# Altium PCB SiPM Readout.PcbDoc
Units mil, origin at the board's own origin, x right, y up, seen from the top; angles counter-clockwise.
Board outline 6690 x 6655 mil, 2 copper layers (Top Layer, Bottom Layer); 101 components, 68 nets, 1500 pads, 43 vias.
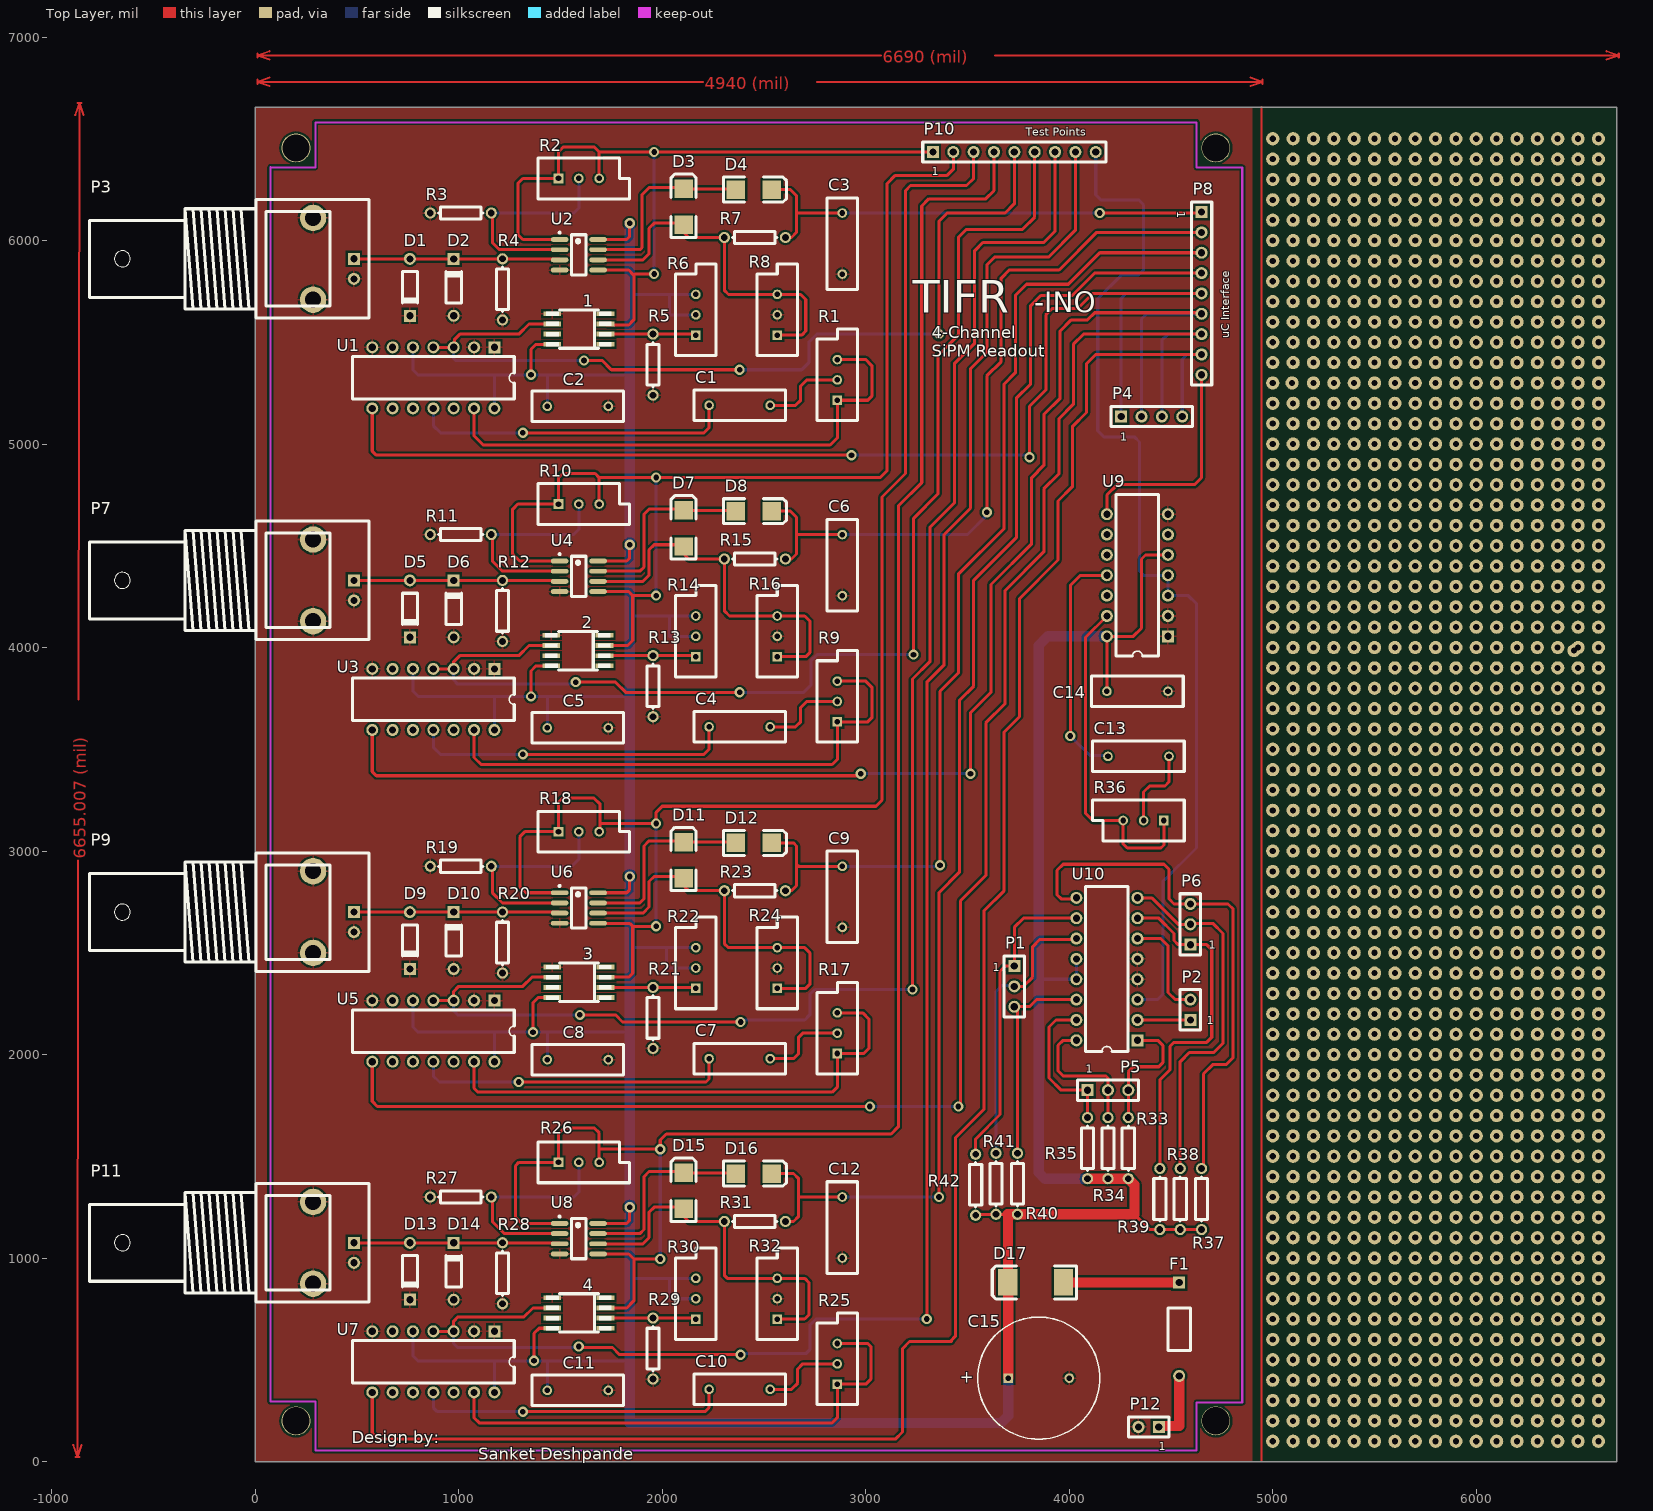
[diagram p0: Top Layer view]
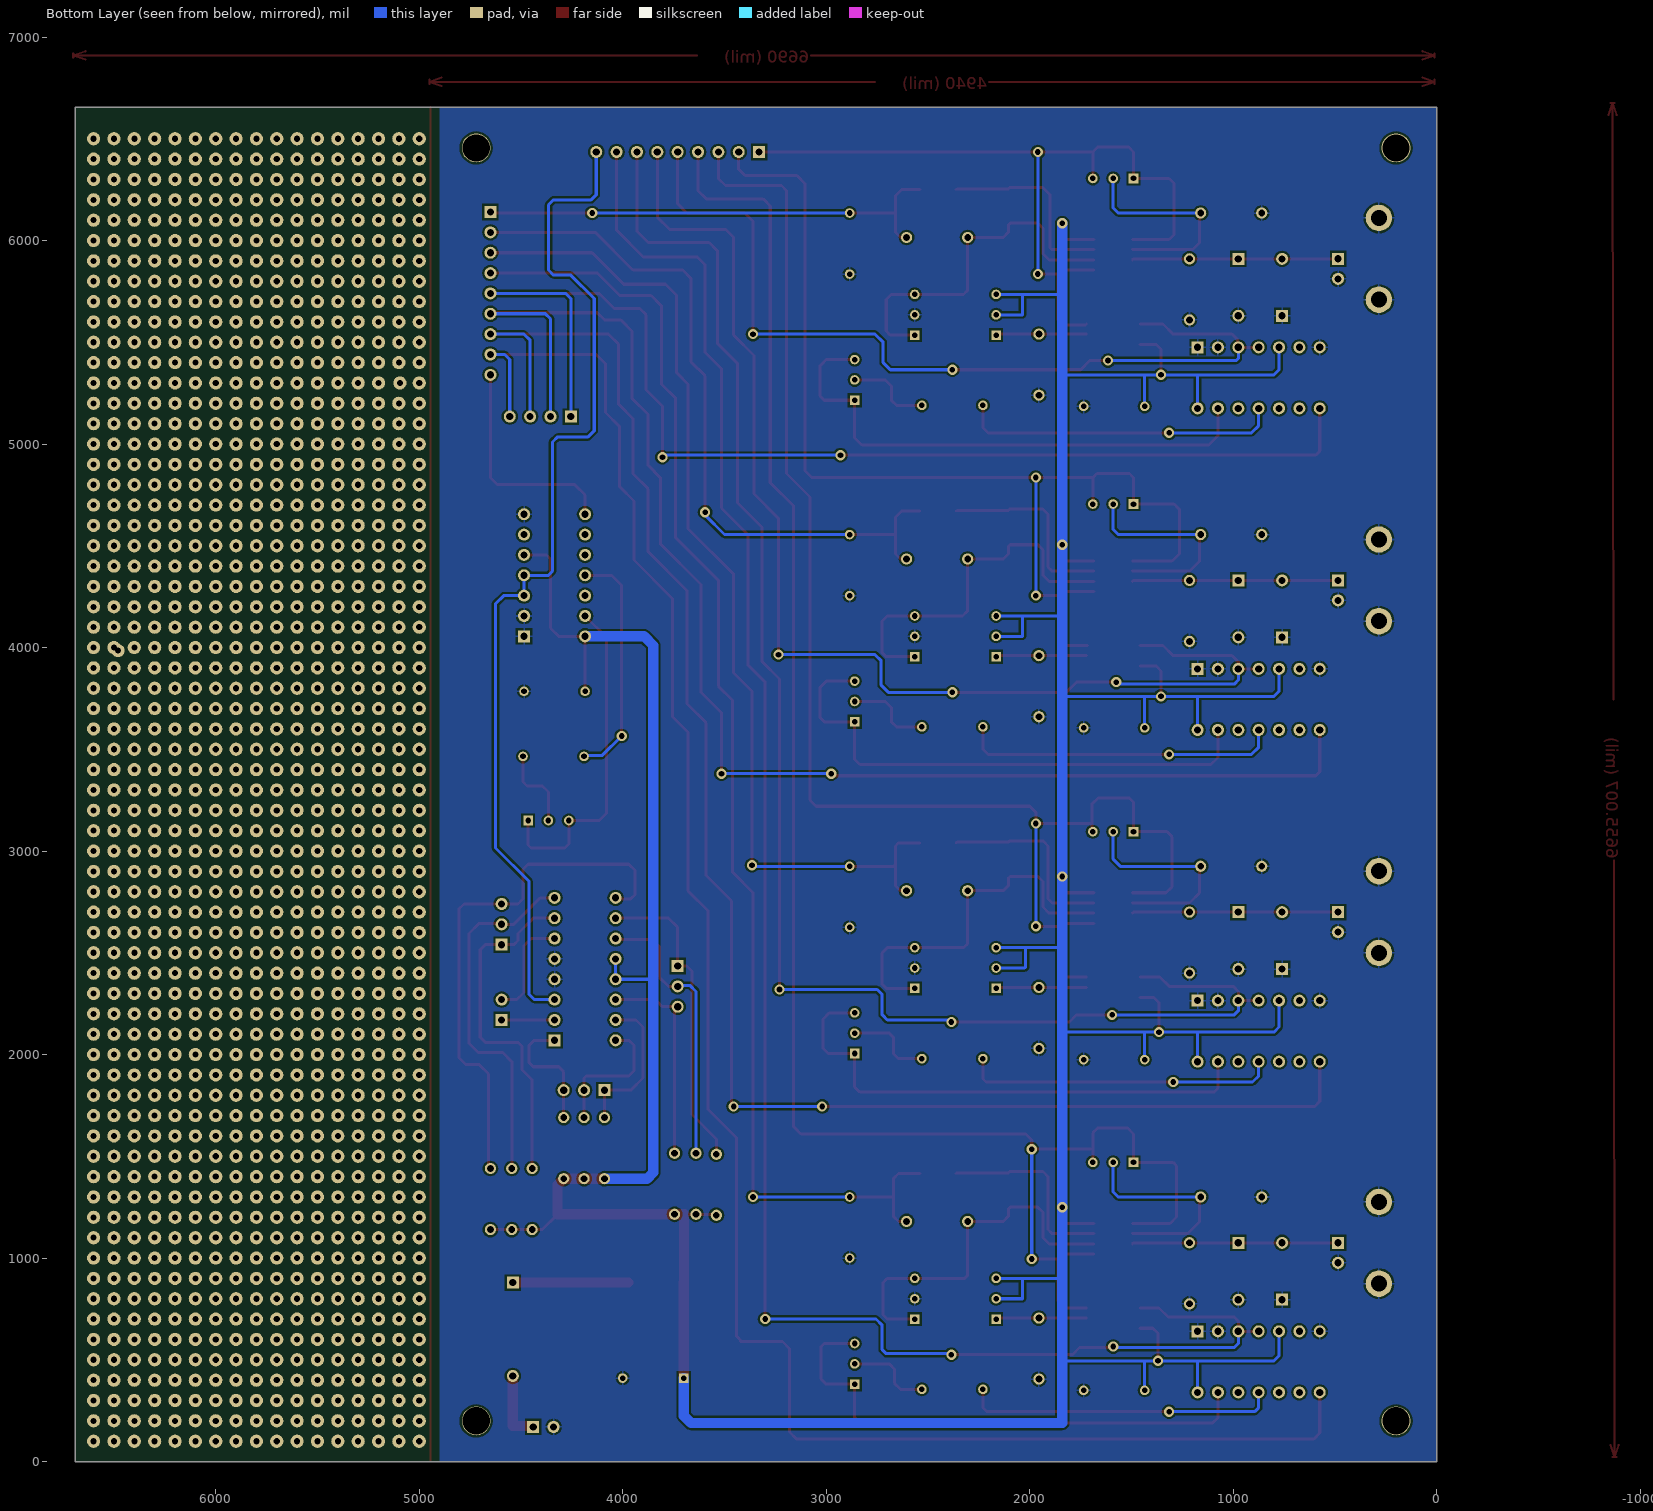
[diagram p1: Bottom Layer view, seen from below]

## Layer stack, top to bottom
Top Solder: solder mask 0.4, Solder Resist, Dk 3.5
Top Layer: signal copper 1.4
Dielectric 1: dielectric 12.6, FR-4, Dk 4.8
Bottom Layer: signal copper 1.4
Bottom Solder: solder mask 0.4, Solder Resist, Dk 3.5

## Board outline
0,0 6690,0 6690,6655 0,6655

## Design rules (kind name [scope] priority, off if disabled: settings)
Clearance [All] p1: gap=10
PolygonConnect [All] p1: connectstyle=Relief reliefconductorwidth=10 reliefentries=4 polygonreliefangle="90 Angle" airgapwidth=10
RoutingVias [All] p1: holewidth=28 width=50 viastyle="Through Hole" minholewidth=28 minwidth=50 maxholewidth=28 maxwidth=50
SolderMaskExpansion [All] p1: expansion=4
Width [All] p1: maxlimit=55 minlimit=15 preferedwidth=15 minimp=50.000000 maximp=50.000000 favimp=50.000000
30 further rules are at their usual default settings.

## Classes and differential pairs
component class "Channel 1": 1 C1 C2 C3 D1 D2 D3 D4 R1 R2 R3 R4 R5 R6 R7 R8 U1 U2
component class "Channel 2": 2 C4 C5 C6 D5 D6 D7 D8 R9 R10 R11 R12 R13 R14 R15 R16 U3 U4
component class "Channel 3": 3 C7 C8 C9 D9 D10 D11 D12 R17 R18 R19 R20 R21 R22 R23 R24 U5 U6
component class "Channel 4": 4 C10 C11 C12 D13 D14 D15 D16 R25 R26 R27 R28 R29 R30 R31 R32 U7 U8

## Components (designator, comment, footprint, x,y, rotation, side; value= is the part's Value field where it differs from the comment)
1 "TL714" SO-08M 1590,5565 r90 top
2 "TL714" SO-08M 1585,3985 r90 top
3 "TL714" SO-08M 1590,2355 r90 top
4 "TL714" SO-08M 1590,730 r90 top
C1 "Cap" RAD-0.3 2380,5190 r0 top
C2 "Cap" RAD-0.3 1585,5185 r180 top
C3 "Cap" RAD-0.3 2885,5985 r90 top
C4 "Cap" RAD-0.3 2380,3610 r0 top
C5 "Cap" RAD-0.3 1585,3605 r180 top
C6 "Cap" RAD-0.3 2885,4405 r90 top
C7 "Cap" RAD-0.3 2380,1980 r0 top
C8 "Cap" RAD-0.3 1585,1975 r180 top
C9 "Cap" RAD-0.3 2885,2775 r90 top
C10 "Cap" RAD-0.3 2380,355 r0 top
C11 "Cap" RAD-0.3 1585,350 r180 top
C12 "Cap" RAD-0.3 2885,1150 r90 top
C13 "Cap" RAD-0.3 4340,3465 r0 top
C14 "Cap" RAD-0.3 4335,3785 r180 top
C15 "Cap Pol1" RB7.6-15 3850,410 r180 top
D1 "Diode 1N914" DO-35 760,5770 r270 top
D2 "Diode 1N914" DO-35 975,5770 r90 top
D3 "D Schottky" SMB 2105,6165 r90 top
D4 "D Schottky" SMB 2450,6250 r0 top
D5 "Diode 1N914" DO-35 760,4190 r270 top
D6 "Diode 1N914" DO-35 975,4190 r90 top
D7 "D Schottky" SMB 2105,4585 r90 top
D8 "D Schottky" SMB 2450,4670 r0 top
D9 "Diode 1N914" DO-35 760,2560 r270 top
D10 "Diode 1N914" DO-35 975,2560 r90 top
D11 "D Schottky" SMB 2105,2955 r90 top
D12 "D Schottky" SMB 2450,3040 r0 top
D13 "Diode 1N914" DO-35 760,935 r270 top
D14 "Diode 1N914" DO-35 975,935 r90 top
D15 "D Schottky" SMB 2105,1330 r90 top
D16 "D Schottky" SMB 2450,1415 r0 top
D17 "Diode" SMC 3835,880 r180 top
F1 "Fuse 2" PIN-W2/E2.8 4540,650 r270 top
P1 "Header 3" HDR1X3 3730,2435 r270 top
P2 "Header 2" HDR1X2 4595,2170 r90 top
P3 "BNC" "BNC_RA CON" 485,5910 r0 top
P4 "Header 4" HDR1X4 4255,5135 r0 top
P5 "Header 3" HDR1X3 4090,1825 r0 top
P6 "Header 3" HDR1X3 4595,2540 r90 top
P7 "BNC" "BNC_RA CON" 485,4330 r0 top
P8 "Micro-Controller Interface" HDR1X9 4650,6140 r270 top
P9 "BNC" "BNC_RA CON" 485,2700 r0 top
P10 "Test Points" HDR1X9 3330,6435 r0 top
P11 "BNC" "BNC_RA CON" 485,1075 r0 top
P12 "Power" HDR1X2 4440,170 r180 top
R1 "RPot" VR5 2860,5315 r90 top
R2 "RPot" VR5 1590,6305 r0 top
R3 "Res1" AXIAL-0.3 1010,6135 r0 top
R4 "Res1" AXIAL-0.3 1215,5760 r90 top
R5 "Res1" AXIAL-0.3 1955,5390 r270 top
R6 "RPot" VR5 2165,5635 r90 top
R7 "Res1" AXIAL-0.3 2455,6015 r0 top
R8 "RPot" VR5 2565,5635 r90 top
R9 "RPot" VR5 2860,3735 r90 top
R10 "RPot" VR5 1590,4705 r0 top
R11 "Res1" AXIAL-0.3 1010,4555 r0 top
R12 "Res1" AXIAL-0.3 1215,4180 r90 top
R13 "Res1" AXIAL-0.3 1955,3810 r270 top
R14 "RPot" VR5 2165,4055 r90 top
R15 "Res1" AXIAL-0.3 2455,4435 r0 top
R16 "RPot" VR5 2565,4055 r90 top
R17 "RPot" VR5 2860,2105 r90 top
R18 "RPot" VR5 1590,3095 r0 top
R19 "Res1" AXIAL-0.3 1010,2925 r0 top
R20 "Res1" AXIAL-0.3 1215,2550 r90 top
R21 "Res1" AXIAL-0.3 1955,2180 r270 top
R22 "RPot" VR5 2165,2425 r90 top
R23 "Res1" AXIAL-0.3 2455,2805 r0 top
R24 "RPot" VR5 2565,2425 r90 top
R25 "RPot" VR5 2860,480 r90 top
R26 "RPot" VR5 1590,1470 r0 top
R27 "Res1" AXIAL-0.3 1010,1300 r0 top
R28 "Res1" AXIAL-0.3 1215,925 r90 top
R29 "Res1" AXIAL-0.3 1955,555 r270 top
R30 "RPot" VR5 2165,800 r90 top
R31 "Res1" AXIAL-0.3 2455,1180 r0 top
R32 "RPot" VR5 2565,800 r90 top
R33 "Res1" AXIAL-0.3 4290,1540 r90 top
R34 "Res1" AXIAL-0.3 4190,1540 r90 top
R35 "Res1" AXIAL-0.3 4090,1540 r90 top
R36 "RPot" VR5 4365,3150 r180 top
R37 "Res1" AXIAL-0.3 4650,1290 r90 top
R38 "Res1" AXIAL-0.3 4545,1290 r90 top
R39 "Res1" AXIAL-0.3 4445,1290 r90 top
R40 "Res1" AXIAL-0.3 3745,1365 r90 top
R41 "Res1" AXIAL-0.3 3640,1365 r90 top
R42 "Res1" AXIAL-0.3 3540,1360 r90 top
U1 "SN54LS122J" J014 875,5325 r180 top
U2 "LMH6628MA" M08A_N 1590,5930 r0 top
U3 "SN54LS122J" J014 875,3745 r180 top
U4 "LMH6628MA" M08A_N 1590,4350 r0 top
U5 "SN54LS122J" J014 875,2115 r180 top
U6 "LMH6628MA" M08A_N 1590,2720 r0 top
U7 "SN54LS122J" J014 875,490 r180 top
U8 "LMH6628MA" M08A_N 1590,1095 r0 top
U9 "SN54LS122J" J014 4335,4355 r90 top
U10 "SN74LS11" J016 4185,2420 r90 top

## Footprints (in the part's own frame and the unit in brackets; to place one, negate y for a bottom-side part, rotate by r counter-clockwise, add the part's x,y. Pads: shape width x height; smd on the part's side, far side on the other; paste and mask are expansions set on the pad)
AXIAL-0.3 [mm] "Axial Device, Thru-Hole; 2 Leads; 0.3 in Pin Spacing"
  round 1.4 hole 0.85: 1(-3.81,0) 2(3.81,0)
  silkscreen extent -2.77,-0.76 2.77,0.76
"BNC_RA CON" [mm] "Connector; BNC Elbow"
  rect 1.5x1.5 hole 0.9: 1(0,0)
  round 3.3 hole 2: 2(-5.1,-5.1) 2(-5.1,5.1)
  round 1.5 hole 0.9: 2(0,-2.5)
  silkscreen extent -33,-7.4 1.9,7.4
DO-35 [mm] "Diode, Axial; Body 3.8 x 1.9 mm (LxDia. max), Lead Dia. 0.53 mm (max)"
  round 1.5 hole 0.9: 1(-3.55,0)
  rect 1.5x1.5 hole 0.9: 2(3.55,0)
  silkscreen extent -1.95,-0.95 2.05,0.95
HDR1X2 [mm] "Connector; Header; 2 Position"
  rect 1.5x1.5 hole 0.9: 1(0,0)
  round 1.5 hole 0.9: 2(2.54,0)
  silkscreen extent -1.27,-1.27 3.81,1.27
HDR1X3 [mm] "Connector; Header; 3 Position"
  rect 1.5x1.5 hole 0.9: 1(0,0)
  round 1.5 hole 0.9: 2(2.54,0) 3(5.08,0)
  silkscreen extent -1.27,-1.27 6.35,1.27
HDR1X4 [mm] "Connector; Header; 4 Position"
  rect 1.5x1.5 hole 0.9: 1(0,0)
  round 1.5 hole 0.9: 2(2.54,0) 3(5.08,0) 4(7.62,0)
  silkscreen extent -1.27,-1.27 8.89,1.27
HDR1X9 [mm] "Connector; Header; 9 Position"
  rect 1.5x1.5 hole 0.9: 1(0,0)
  round 1.5 hole 0.9: 2(2.54,0) 3(5.08,0) 4(7.62,0) 5(10.16,0) 6(12.7,0) 7(15.24,0) 8(17.78,0) 9(20.32,0)
  silkscreen extent -1.27,-1.27 21.59,1.27
J014 [mm] "DIP; 14 Leads; Row Spacing 7.62 mm; Pitch 2.54 mm"
  rect 1.5x1.5 hole 0.9: 1(-7.62,-3.81)
  round 1.5 hole 0.9: 2(-5.08,-3.81) 3(-2.54,-3.81) 4(0,-3.81) 5(2.54,-3.81) 6(5.08,-3.81) 7(7.62,-3.81) 8(7.62,3.81) 9(5.08,3.81) 10(2.54,3.81) 11(0,3.81) 12(-2.54,3.81) 13(-5.08,3.81) 14(-7.62,3.81)
  silkscreen extent -10.1,-2.65 10.1,2.65
J016 [mm] "DIP; 16 Leads; Row Spacing 7.62 mm; Pitch 2.54 mm"
  rect 1.5x1.5 hole 0.9: 1(-8.89,-3.81)
  round 1.5 hole 0.9: 2(-6.35,-3.81) 3(-3.81,-3.81) 4(-1.27,-3.81) 5(1.27,-3.81) 6(3.81,-3.81) 7(6.35,-3.81) 8(8.89,-3.81) 9(8.89,3.81) 10(6.35,3.81) 11(3.81,3.81) 12(1.27,3.81) 13(-1.27,3.81) 14(-3.81,3.81) 15(-6.35,3.81) 16(-8.89,3.81)
  silkscreen extent -10.3,-2.65 10.3,2.65
M08A_N [mm] "SOIC, 8-Leads, Body 4.9x3.9mm, Pitch 1.27mm, IPC Medium Density"
  oval 2.2x0.6 smd: 1(-2.4,1.905) 2(-2.4,0.635) 3(-2.4,-0.635) 4(-2.4,-1.905) 5(2.4,-1.905) 6(2.4,-0.635) 7(2.4,0.635) 8(2.4,1.905)
  silkscreen extent -2.52,-2.5 0.9,2.88, body extent -2,-2.5 2,2.5, height 1.75
PIN-W2/E2.8 [mm] "Thru-Hole; 2 Leads"
  rect 1.5x1.5 hole 0.9: 1(-5.825,0)
  round 1.5 hole 0.9: 2(5.825,0)
  silkscreen extent -2.65,-1.4 2.65,1.4
RAD-0.3 [mm] "Radial Cap, Thru-Hole; 2 Leads; 0.3 in Pin Spacing"
  round 1.2 hole 0.7: 1(-3.81,0) 2(3.81,0)
  silkscreen extent -5.71,-1.91 5.71,1.91
RB7.6-15 [mm] "Polarized Capacitor (Radial); 2 Leads"
  rect 1.2x1.2 hole 0.7: 1(3.81,0)
  round 1.2 hole 0.7: 2(-3.81,0)
  silkscreen extent -7.62,-7.62 7.62,7.62
SMB [mm] "DO-214-AA/SMB; 2 C-Bend Leads; Body 5.3 x 3.6 mm, inc. leads (LxW)"
  rect 2.3x2.3 smd: 1(-2.25,0) 2(2.25,0)
  silkscreen extent -3.8,-1.55 4.1,1.55
SMC [mm] "DO-214-AB/SMC; 2 C-Bend Leads; Body 7.9 x 5.9 mm, inc. leads (LxW)"
  rect 2.4x3.3 smd: 1(-3.475,0) 2(3.475,0)
  silkscreen extent -5.07,-2.05 5.43,2.05
SO-08M [mm]
  rect 0.6x2.2 smd: 1(-1.905,-3.33) 2(-0.635,-3.33) 3(0.635,-3.33) 4(1.905,-3.33) 5(1.905,3.33) 6(0.635,3.33) 7(-0.635,3.33) 8(-1.905,3.33)
  silkscreen extent -2.4,-4.06 2.4,4.05
VR5 [mm] "Thru-Hole; 3 Leads"
  rect 1.2x1.2 hole 0.7: 1(-2.54,0)
  round 1.2 hole 0.7: 2(0,0) 3(2.54,0)
  silkscreen extent -5.08,-2.54 6.35,2.54

## Part data
1 2 3 4: "The TL714C is a high-speed differential comparator fabricated with bipolar Schottky process technology. The circuit h..."
C1 C2 C3 C4 C5 C6 C7 C8 C9 C10 C11 C12 C13 C14: "Capacitor"
C15: "Polarized Capacitor (Radial)"
D1 D2 D5 D6 D9 D10 D13 D14: "High Conductance Fast Diode"
D3 D4 D7 D8 D11 D12 D15 D16: "Schottky Diode"
D17: "Default Diode"
F1: "Fuse"
P1 P5 P6: "Header, 3-Pin"
P2: "Header, 2-Pin"
P3 P7 P9 P11: "BNC Elbow Connector"
P4: "Header, 4-Pin"
P8 P10: library part "Header 9", "Header, 9-Pin"
P12: library part "Header 2", "Header, 2-Pin"
R1 R2 R6 R8 R9 R10 R14 R16 R17 R18 R22 R24 R25 R26 R30 R32 R36: "Potentiometer"
R3 R4 R5 R7 R11 R12 R13 R15 R19 R20 R21 R23 R27 R28 R29 R31 R33 R34 R35 R37 R38 R39 R40 R41 R42: "Resistor"
U1 U3 U5 U7 U9: "Retriggerable Monostable Multivibrator"
U2 U4 U6 U8: "Dual Wideband, Low Noise, Voltage Feedback Op Amp, 8-pin Narrow SOIC"
U10: library part 54AC11011J, "Triple 3-Input Positive-AND Gate"

## Free pads (board coordinates)
  round 141.73 hole 133.86: 2(200,6455) 3(200,200) 3(4720,200) 3(4720,6455)
  round 65 hole 30: 4(5000,6200) 4(5000,6500) 5(5000,6100) 5(5000,6400) 6(5000,6000) 6(5000,6300) 7(5000,5900) 8(5000,5800) 9(5000,5700) 10(5000,5600) 11(5000,5500) 12(5000,5400) 13(5000,5300) 14(5000,5200) 15(5000,5100) 16(5000,5000) 17(5000,4900) 18(5000,4800) 19(5000,4700) 20(5000,4600) 21(5000,4500) 22(5000,4400) 23(5000,4300) 24(5000,4200) 25(5000,4100) 26(5000,3900) 27(5000,4000) 28(5000,3800) 29(5000,3700) 30(5000,3600) 31(5000,3500) 32(5000,3400) 33(5000,3300) 34(5000,3200) 35(5000,3100) 36(5000,3000) 37(5000,2900) 38(5000,1400) 38(5000,2800) 39(5000,1300) 39(5000,2700) 40(5000,1200) 40(5000,2600) 41(5000,1100) 41(5000,2500) 42(5000,1000) 42(5000,2400) 43(5000,900) 43(5000,2300) 44(5000,800) 44(5000,2200) 45(5000,600) 45(5000,2000) 46(5000,700) 46(5000,2100) 47(5100,300) 47(5100,600) 47(5100,900) 47(5100,1200) 47(5100,1700) 47(5100,2000) 47(5100,2300) 47(5100,2600) 47(5100,2900) 47(5100,3200) 47(5100,3500) 47(5100,3800) 47(5100,4100) 47(5100,4400) 47(5100,4700) 47(5100,5000) 47(5100,5600) 47(5100,5900) 47(5100,6200) 47(5100,6500) 47(6480,3985) 48(5200,300) 48(5200,600) 48(5200,900) 48(5200,1200) 48(5200,1700) 48(5200,2000) 48(5200,2300) 48(5200,2600) 48(5200,2900) 48(5200,3200) 48(5200,3500) 48(5200,3800) 48(5200,4100) 48(5200,4400) 48(5200,4700) 48(5200,5000) 48(5200,5300) 48(5200,5600) 48(5200,5900) 48(5200,6200) 48(5200,6500) 49(5300,300) 49(5300,600) 49(5300,900) 49(5300,1200) 49(5300,1700) 49(5300,2000) 49(5300,2300) 49(5300,2600) 49(5300,2900) 49(5300,3200) 49(5300,3500) 49(5300,3800) 49(5300,4100) 49(5300,4400) 49(5300,4700) 49(5300,5000) 49(5300,5300) 49(5300,5600) 49(5300,5900) 49(5300,6200) 49(5300,6500) 50(5400,300) 50(5400,600) 50(5400,900) 50(5400,1200) 50(5400,1700) 50(5400,2000) 50(5400,2300) 50(5400,2600) 50(5400,2900) 50(5400,3200) 50(5400,3500) 50(5400,3800) 50(5400,4100) 50(5400,4400) 50(5400,4700) 50(5400,5000) 50(5400,5300) 50(5400,5600) 50(5400,5900) 50(5400,6200) 50(5400,6500) 51(5500,300) 51(5500,600) 51(5500,900) 51(5500,1200) 51(5500,1700) 51(5500,2000) 51(5500,2300) 51(5500,2600) 51(5500,2900) 51(5500,3200) 51(5500,3500) 51(5500,3800) 51(5500,4100) 51(5500,4400) 51(5500,4700) 51(5500,5000) 51(5500,5300) 51(5500,5600) 51(5500,5900) 51(5500,6200) 51(5500,6500) 52(5600,300) 52(5600,600) 52(5600,900) 52(5600,1200) 52(5600,1700) 52(5600,2000) 52(5600,2300) 52(5600,2600) 52(5600,2900) 52(5600,3200) 52(5600,3500) 52(5600,3800) 52(5600,4100) 52(5600,4400) 52(5600,4700) 52(5600,5000) 52(5600,5300) 52(5600,5600) 52(5600,5900) 52(5600,6200) 52(5600,6500) 53(5700,300) 53(5700,600) 53(5700,900) 53(5700,1200) 53(5700,1700) 53(5700,2000) 53(5700,2300) 53(5700,2600) 53(5700,2900) 53(5700,3200) 53(5700,3500) 53(5700,3800) 53(5700,4100) 53(5700,4400) 53(5700,4700) 53(5700,5000) 53(5700,5300) 53(5700,5600) 53(5700,5900) 53(5700,6200) 53(5700,6500) 54(5900,300) 54(5900,600) 54(5900,900) 54(5900,1200) 54(5900,1700) 54(5900,2000) 54(5900,2300) 54(5900,2600) 54(5900,2900) 54(5900,3200) 54(5900,3500) 54(5900,3800) 54(5900,4100) 54(5900,4400) 54(5900,4700) 54(5900,5000) 54(5900,5300) 54(5900,5600) 54(5900,5900) 54(5900,6200) 54(5900,6500) 55(5800,300) 55(5800,600) 55(5800,900) 55(5800,1200) 55(5800,1700) 55(5800,2000) 55(5800,2300) 55(5800,2600) 55(5800,2900) 55(5800,3200) 55(5800,3500) 55(5800,3800) 55(5800,4100) 55(5800,4400) 55(5800,4700) 55(5800,5000) 55(5800,5300) 55(5800,5600) 55(5800,5900) 55(5800,6200) 55(5800,6500) 56(6000,300) 56(6000,600) 56(6000,900) 56(6000,1200) 56(6000,1700) 56(6000,2000) 56(6000,2300) 56(6000,2600) 56(6000,2900) 56(6000,3200) 56(6000,3500) 56(6000,3800) 56(6000,4100) 56(6000,4400) 56(6000,4700) 56(6000,5000) 56(6000,5300) 56(6000,5600) 56(6000,5900) 56(6000,6200) 56(6000,6500) 57(6100,300) 57(6100,600) 57(6100,900) 57(6100,1200) 57(6100,1700) 57(6100,2000) 57(6100,2300) 57(6100,2600) 57(6100,2900) 57(6100,3200) 57(6100,3500) 57(6100,3800) 57(6100,4100) 57(6100,4400) 57(6100,4700) 57(6100,5000) 57(6100,5300) 57(6100,5600) 57(6100,5900) 57(6100,6200) 57(6100,6500) 58(6200,300) 58(6200,600) 58(6200,900) 58(6200,1200) 58(6200,1700) 58(6200,2000) 58(6200,2300) 58(6200,2600) 58(6200,2900) 58(6200,3200) 58(6200,3500) 58(6200,3800) 58(6200,4100) 58(6200,4400) 58(6200,4700) 58(6200,5000) 58(6200,5300) 58(6200,5600) 58(6200,5900) 58(6200,6200) 58(6200,6500) 59(6400,300) 59(6400,600) 59(6400,900) 59(6400,1200) 59(6400,1700) 59(6400,2000) 59(6400,2300) 59(6400,2600) 59(6400,2900) 59(6400,3200) 59(6400,3500) 59(6400,3800) 59(6400,4100) 59(6400,4400) 59(6400,4700) 59(6400,5000) 59(6400,5300) 59(6400,5600) 59(6400,5900) 59(6400,6200) 59(6400,6500) 60(6500,300) 60(6500,600) 60(6500,900) 60(6500,1200) 60(6500,1700) 60(6500,2000) 60(6500,2300) 60(6500,2600) 60(6500,2900) 60(6500,3200) 60(6500,3500) 60(6500,3800) 60(6500,4100) 60(6500,4400) 60(6500,4700) 60(6500,5000) 60(6500,5300) 60(6500,5600) 60(6500,5900) 60(6500,6200) 60(6500,6500) 61(6600,300) 61(6600,600) 61(6600,900) 61(6600,1200) 61(6600,1700) 61(6600,2000) 61(6600,2300) 61(6600,2600) 61(6600,2900) 61(6600,3200) 61(6600,3500) 61(6600,3800) 61(6600,4100) 61(6600,4400) 61(6600,4700) 61(6600,5000) 61(6600,5300) 61(6600,5600) 61(6600,5900) 61(6600,6200) 61(6600,6500) 62(6600,200) 62(6600,500) 62(6600,800) 62(6600,1100) 62(6600,1400) 62(6600,1600) 62(6600,1900) 62(6600,2200) 62(6600,2500) 62(6600,2800) 62(6600,3100) 62(6600,3400) 62(6600,3700) 62(6600,4000) 62(6600,4300) 62(6600,4600) 62(6600,4900) 62(6600,5200) 62(6600,5500) 62(6600,5800) 62(6600,6100) 62(6600,6400) 63(6500,200) 63(6500,500) 63(6500,800) 63(6500,1100) 63(6500,1400) 63(6500,1600) 63(6500,1900) 63(6500,2200) 63(6500,2500) 63(6500,2800) 63(6500,3100) 63(6500,3400) 63(6500,3700) 63(6500,4000) 63(6500,4300) 63(6500,4600) 63(6500,4900) 63(6500,5200) 63(6500,5500) 63(6500,5800) 63(6500,6100) 63(6500,6400) 64(6300,200) 64(6300,500) 64(6300,800) 64(6300,1100) 64(6300,1400) 64(6300,1600) 64(6300,1900) 64(6300,2200) 64(6300,2500) 64(6300,2800) 64(6300,3100) 64(6300,3400) 64(6300,3700) 64(6300,4000) 64(6300,4300) 64(6300,4600) 64(6300,4900) 64(6300,5200) 64(6300,5500) 64(6300,5800) 64(6300,6100) 64(6300,6400) 65(6300,300) 65(6300,600) 65(6300,900) 65(6300,1200) 65(6300,1700) 65(6300,2000) 65(6300,2300) 65(6300,2600) 65(6300,2900) 65(6300,3200) 65(6300,3500) 65(6300,3800) 65(6300,4100) 65(6300,4400) 65(6300,4700) 65(6300,5000) 65(6300,5300) 65(6300,5600) 65(6300,5900) 65(6300,6200) 65(6300,6500) 66(6400,200) 66(6400,500) 66(6400,800) 66(6400,1100) 66(6400,1400) 66(6400,1600) 66(6400,1900) 66(6400,2200) 66(6400,2500) 66(6400,2800) 66(6400,3100) 66(6400,3400) 66(6400,3700) 66(6400,4000) 66(6400,4300) 66(6400,4600) 66(6400,4900) 66(6400,5200) 66(6400,5500) 66(6400,5800) 66(6400,6100) 66(6400,6400) 67(6200,200) 67(6200,500) 67(6200,800) 67(6200,1100) 67(6200,1400) 67(6200,1600) 67(6200,1900) 67(6200,2200) 67(6200,2500) 67(6200,2800) 67(6200,3100) 67(6200,3400) 67(6200,3700) 67(6200,4000) 67(6200,4300) 67(6200,4600) 67(6200,4900) 67(6200,5200) 67(6200,5500) 67(6200,5800) 67(6200,6100) 67(6200,6400) 68(6100,200) 68(6100,500) 68(6100,800) 68(6100,1100) 68(6100,1400) 68(6100,1600) 68(6100,1900) 68(6100,2200) 68(6100,2500) 68(6100,2800) 68(6100,3100) 68(6100,3400) 68(6100,3700) 68(6100,4000) 68(6100,4300) 68(6100,4600) 68(6100,4900) 68(6100,5200) 68(6100,5500) 68(6100,5800) 68(6100,6100) 68(6100,6400) 69(6000,200) 69(6000,500) 69(6000,800) 69(6000,1100) 69(6000,1400) 69(6000,1600) 69(6000,1900) 69(6000,2200) 69(6000,2500) 69(6000,2800) 69(6000,3100) 69(6000,3400) 69(6000,3700) 69(6000,4000) 69(6000,4300) 69(6000,4600) 69(6000,4900) 69(6000,5200) 69(6000,5500) 69(6000,5800) 69(6000,6100) 69(6000,6400) 70(5800,200) 70(5800,500) 70(5800,800) 70(5800,1100) 70(5800,1400) 70(5800,1600) 70(5800,1900) 70(5800,2200) 70(5800,2500) 70(5800,2800) 70(5800,3100) 70(5800,3400) 70(5800,3700) 70(5800,4000) 70(5800,4300) 70(5800,4600) 70(5800,4900) 70(5800,5200) 70(5800,5500) 70(5800,5800) 70(5800,6100) 70(5800,6400) 71(5900,200) 71(5900,500) 71(5900,800) 71(5900,1100) 71(5900,1400) 71(5900,1600) 71(5900,1900) 71(5900,2200) 71(5900,2500) 71(5900,2800) 71(5900,3100) 71(5900,3400) 71(5900,3700) 71(5900,4000) 71(5900,4300) 71(5900,4600) 71(5900,4900) 71(5900,5200) 71(5900,5500) 71(5900,5800) 71(5900,6100) 71(5900,6400) 72(5600,200) 72(5600,500) 72(5600,800) 72(5600,1100) 72(5600,1400) 72(5600,1600) 72(5600,1900) 72(5600,2200) 72(5600,2500) 72(5600,2800) 72(5600,3100) 72(5600,3400) 72(5600,3700) 72(5600,4000) 72(5600,4300) 72(5600,4600) 72(5600,4900) 72(5600,5200) 72(5600,5500) 72(5600,5800) 72(5600,6100) 72(5600,6400) 73(5700,200) 73(5700,500) 73(5700,800) 73(5700,1100) 73(5700,1400) 73(5700,1600) 73(5700,1900) 73(5700,2200) 73(5700,2500) 73(5700,2800) 73(5700,3100) 73(5700,3400) 73(5700,3700) 73(5700,4000) 73(5700,4300) 73(5700,4600) 73(5700,4900) 73(5700,5200) 73(5700,5500) 73(5700,5800) 73(5700,6100) 73(5700,6400) 74(5500,200) 74(5500,500) 74(5500,800) 74(5500,1100) 74(5500,1400) 74(5500,1600) 74(5500,1900) 74(5500,2200) 74(5500,2500) 74(5500,2800) 74(5500,3100) 74(5500,3400) 74(5500,3700) 74(5500,4000) 74(5500,4300) 74(5500,4600) 74(5500,4900) 74(5500,5200) 74(5500,5500) 74(5500,5800) 74(5500,6100) 74(5500,6400) 75(5400,200) 75(5400,500) 75(5400,800) 75(5400,1100) 75(5400,1400) 75(5400,1600) 75(5400,1900) 75(5400,2200) 75(5400,2500) 75(5400,2800) 75(5400,3100) 75(5400,3400) 75(5400,3700) 75(5400,4000) 75(5400,4300) 75(5400,4600) 75(5400,4900) 75(5400,5200) 75(5400,5500) 75(5400,5800) 75(5400,6100) 75(5400,6400) 76(5300,200) 76(5300,500) 76(5300,800) 76(5300,1100) 76(5300,1400) 76(5300,1600) 76(5300,1900) 76(5300,2200) 76(5300,2500) 76(5300,2800) 76(5300,3100) 76(5300,3400) 76(5300,3700) 76(5300,4000) 76(5300,4300) 76(5300,4600) 76(5300,4900) 76(5300,5200) 76(5300,5500) 76(5300,5800) 76(5300,6100) 76(5300,6400) 77(5200,200) 77(5200,500) 77(5200,800) 77(5200,1100) 77(5200,1400) 77(5200,1600) 77(5200,1900) 77(5200,2200) 77(5200,2500) 77(5200,2800) 77(5200,3100) 77(5200,3400) 77(5200,3700) 77(5200,4000) 77(5200,4300) 77(5200,4600) 77(5200,4900) 77(5200,5200) 77(5200,5500) 77(5200,5800) 77(5200,6100) 77(5200,6400) 78(5100,200) 78(5100,500) 78(5100,800) 78(5100,1100) 78(5100,1400) 78(5100,1600) 78(5100,1900) 78(5100,2200) 78(5100,2500) 78(5100,2800) 78(5100,3100) 78(5100,3400) 78(5100,3700) 78(5100,4000) 78(5100,4300) 78(5100,4600) 78(5100,4900) 78(5100,5200) 78(5100,5500) 78(5100,5800) 78(5100,6100) 78(5100,6400) 79(5100,100) 79(5100,400) 79(5100,700) 79(5100,1000) 79(5100,1300) 79(5100,1500) 79(5100,1800) 79(5100,2100) 79(5100,2400) 79(5100,2700) 79(5100,3000) 79(5100,3300) 79(5100,3600) 79(5100,3900) 79(5100,4200) 79(5100,4500) 79(5100,4800) 79(5100,5100) 79(5100,5400) 79(5100,5700) 79(5100,6000) 79(5100,6300) 80(5200,100) 80(5200,400) 80(5200,700) 80(5200,1000) 80(5200,1300) 80(5200,1500) 80(5200,1800) 80(5200,2100) 80(5200,2400) 80(5200,2700) 80(5200,3000) 80(5200,3300) 80(5200,3600) 80(5200,3900) 80(5200,4200) 80(5200,4500) 80(5200,4800) 80(5200,5100) 80(5200,5400) 80(5200,5700) 80(5200,6000) 80(5200,6300) 81(5400,100) 81(5400,400) 81(5400,700) 81(5400,1000) 81(5400,1300) 81(5400,1500) 81(5400,1800) 81(5400,2100) 81(5400,2400) 81(5400,2700) 81(5400,3000) 81(5400,3300) 81(5400,3600) 81(5400,3900) 81(5400,4200) 81(5400,4500) 81(5400,4800) 81(5400,5100) 81(5400,5400) 81(5400,5700) 81(5400,6000) 81(5400,6300) 82(5300,100) 82(5300,400) 82(5300,700) 82(5300,1000) 82(5300,1300) 82(5300,1500) 82(5300,1800) 82(5300,2100) 82(5300,2400) 82(5300,2700) 82(5300,3000) 82(5300,3300) 82(5300,3600) 82(5300,3900) 82(5300,4200) 82(5300,4500) 82(5300,4800) 82(5300,5100) 82(5300,5400) 82(5300,5700) 82(5300,6000) 82(5300,6300) 83(5500,100) 83(5500,400) 83(5500,700) 83(5500,1000) 83(5500,1300) 83(5500,1500) 83(5500,1800) 83(5500,2100) 83(5500,2400) 83(5500,2700) 83(5500,3000) 83(5500,3300) 83(5500,3600) 83(5500,3900) 83(5500,4200) 83(5500,4500) 83(5500,4800) 83(5500,5100) 83(5500,5400) 83(5500,5700) 83(5500,6000) 83(5500,6300) 84(5600,100) 84(5600,400) 84(5600,700) 84(5600,1000) 84(5600,1300) 84(5600,1500) 84(5600,1800) 84(5600,2100) 84(5600,2400) 84(5600,2700) 84(5600,3000) 84(5600,3300) 84(5600,3600) 84(5600,3900) 84(5600,4200) 84(5600,4500) 84(5600,4800) 84(5600,5100) 84(5600,5400) 84(5600,5700) 84(5600,6000) 84(5600,6300) 85(5700,100) 85(5700,400) 85(5700,700) 85(5700,1000) 85(5700,1300) 85(5700,1500) 85(5700,1800) 85(5700,2100) 85(5700,2400) 85(5700,2700) 85(5700,3000) 85(5700,3300) 85(5700,3600) 85(5700,3900) 85(5700,4200) 85(5700,4500) 85(5700,4800) 85(5700,5100) 85(5700,5400) 85(5700,5700) 85(5700,6000) 85(5700,6300) 86(5700,100) 86(5700,400) 86(5700,700) 86(5700,1000) 86(5700,1300) 86(5700,1500) 86(5700,1800) 86(5700,2100) 86(5700,2400) 86(5700,2700) 86(5700,3000) 86(5700,3300) 86(5700,3600) 86(5700,3900) 86(5700,4200) 86(5700,4500) 86(5700,4800) 86(5700,5100) 86(5700,5400) 86(5700,5700) 86(5700,6000) 86(5700,6300) 87(5800,100) 87(5800,400) 87(5800,700) 87(5800,1000) 87(5800,1300) 87(5800,1500) 87(5800,1800) 87(5800,2100) 87(5800,2400) 87(5800,2700) 87(5800,3000) 87(5800,3300) 87(5800,3600) 87(5800,3900) 87(5800,4200) 87(5800,4500) 87(5800,4800) 87(5800,5100) 87(5800,5400) 87(5800,5700) 87(5800,6000) 87(5800,6300) 88(5900,100) 88(5900,400) 88(5900,700) 88(5900,1000) 88(5900,1300) 88(5900,1500) 88(5900,1800) 88(5900,2100) 88(5900,2400) 88(5900,2700) 88(5900,3000) 88(5900,3300) 88(5900,3600) 88(5900,3900) 88(5900,4200) 88(5900,4500) 88(5900,4800) 88(5900,5100) 88(5900,5400) 88(5900,5700) 88(5900,6000) 88(5900,6300) 89(6000,100) 89(6000,400) 89(6000,700) 89(6000,1000) 89(6000,1300) 89(6000,1500) 89(6000,1800) 89(6000,2100) 89(6000,2400) 89(6000,2700) 89(6000,3000) 89(6000,3300) 89(6000,3600) 89(6000,3900) 89(6000,4200) 89(6000,4500) 89(6000,4800) 89(6000,5100) 89(6000,5400) 89(6000,5700) 89(6000,6000) 89(6000,6300) 90(6200,100) 90(6200,400) 90(6200,700) 90(6200,1000) 90(6200,1300) 90(6200,1500) 90(6200,1800) 90(6200,2100) 90(6200,2400) 90(6200,2700) 90(6200,3000) 90(6200,3300) 90(6200,3600) 90(6200,3900) 90(6200,4200) 90(6200,4500) 90(6200,4800) 90(6200,5100) 90(6200,5400) 90(6200,5700) 90(6200,6000) 90(6200,6300) 91(6100,100) 91(6100,400) 91(6100,700) 91(6100,1000) 91(6100,1300) 91(6100,1500) 91(6100,1800) 91(6100,2100) 91(6100,2400) 91(6100,2700) 91(6100,3000) 91(6100,3300) 91(6100,3600) 91(6100,3900) 91(6100,4200) 91(6100,4500) 91(6100,4800) 91(6100,5100) 91(6100,5400) 91(6100,5700) 91(6100,6000) 91(6100,6300) 92(6300,100) 92(6300,400) 92(6300,700) 92(6300,1000) 92(6300,1300) 92(6300,1500) 92(6300,1800) 92(6300,2100) 92(6300,2400) 92(6300,2700) 92(6300,3000) 92(6300,3300) 92(6300,3600) 92(6300,3900) 92(6300,4200) 92(6300,4500) 92(6300,4800) 92(6300,5100) 92(6300,5400) 92(6300,5700) 92(6300,6000) 92(6300,6300) 93(6400,100) 93(6400,400) 93(6400,700) 93(6400,1000) 93(6400,1300) 93(6400,1500) 93(6400,1800) 93(6400,2100) 93(6400,2400) 93(6400,2700) 93(6400,3000) 93(6400,3300) 93(6400,3600) 93(6400,3900) 93(6400,4200) 93(6400,4500) 93(6400,4800) 93(6400,5100) 93(6400,5400) 93(6400,5700) 93(6400,6000) 93(6400,6300) 94(6500,100) 94(6500,400) 94(6500,700) 94(6500,1000) 94(6500,1300) 94(6500,1500) 94(6500,1800) 94(6500,2100) 94(6500,2400) 94(6500,2700) 94(6500,3000) 94(6500,3300) 94(6500,3600) 94(6500,3900) 94(6500,4200) 94(6500,4500) 94(6500,4800) 94(6500,5100) 94(6500,5400) 94(6500,5700) 94(6500,6000) 94(6500,6300) 97(6600,100) 97(6600,400) 97(6600,700) 97(6600,1000) 97(6600,1300) 97(6600,1500) 97(6600,1800) 97(6600,2100) 97(6600,2400) 97(6600,2700) 97(6600,3000) 97(6600,3300) 97(6600,3600) 97(6600,3900) 97(6600,4200) 97(6600,4500) 97(6600,4800) 97(6600,5100) 97(6600,5400) 97(6600,5700) 97(6600,6000) 97(6600,6300) 98(5000,500) 98(5000,1900) 99(5000,400) 99(5000,1800) 100(5000,300) 100(5000,1700) 101(5000,200) 101(5000,1600) 102(5000,100) 102(5000,1500) 103(5095,5300)

## Via types
v1: diameter 50, hole 28, Top Layer to Bottom Layer, 43 vias

## Nets (pads, with @x,y where several pads share a name; then routed paths per layer and width w, separated by ;. In a path a pad name is that pad's centre, name@x,y a point inside that pad or via, vN(x,y) a via of type N, cw(c..) or ccw(c..) an arc to the next point about the centre after c; other vN are vias at no path point)
AMP_1: 1.3 P10.1 R2.1 R2.3 U2.1 U2.5 | length 4049.1
  Top Layer w15: U2.1 1315,6005 1290,6030 1290,6280 1315,6305 R2.1 1490,6435 1515,6460 1665,6460 1690,6435 ; U2.5 1835,5855 1860,5830 1860,5610 1835,5585 1726.1,5585 1.3 ; R2.3 1690,6435 ; 1865,5835 v1(1960,5835) ; P10.1 v1(1960,6435) 1690,6435
  Bottom Layer w15: v1(1960,5835) v1(1960,6435)
AMP_2: 2.3 P10.2 R10.1 R10.3 U4.1 U4.5 | length 5698.5
  Top Layer w15: U4.1 1300,4425 1265,4460 1265,4680 1290,4705 R10.1 1490,4835 1510,4855 1670,4855 1690,4835 ; U4.5 1835,4275 1855,4255 ; R10.3 1690,4835 ; 2.3 1830,4010 1855,4035 1855,4255 ; v1(1970,4255) 1855,4255 ; P10.2 3430,6350 3400,6320 3145,6320 3105,6280 3105,4870 3070,4835 v1(1970,4835) 1690,4835
  Bottom Layer w15: v1(1970,4255) v1(1970,4835)
AMP_3: 3.3 P10.3 R18.1 R18.3 U6.1 U6.5 | length 7329.4
  Top Layer w15: U6.1 1330,2795 1300,2825 1300,3070 1325,3095 R18.1 1490,3240 1510,3260 1665,3260 1695,3230 1695,3140 ; U6.5 1840,2645 1855,2630 ; R18.3 1695,3100 1695,3140 ; 3.3 1835,2380 1855,2400 1855,2630 ; v1(1970,2630) 1855,2630 ; P10.3 3530,6305 3495,6270 3220,6270 3195,6245 3195,4855 3080,4740 3080,3250 3050,3220 2000,3220 1970,3190 v1(1970,3135) 1700,3135 1695,3140
  Bottom Layer w15: v1(1970,2630) v1(1970,3135)
AMP_4: 4.3 P10.4 R26.1 R26.3 U8.1 U8.5 | length 9113.2
  Top Layer w15: U8.1 1310,1170 1278.36,1201.64 1278.36,1453.36 1295,1470 R26.1 1490,1610 1520,1640 1665,1640 1690,1615 1690,1535 ; U8.5 1835,1020 1860,995 ; R26.3 1690,1535 ; 4.3 1825,755 1860,790 1860,995 ; v1(1990,995) 1860,995 ; P10.4 3630,6245 3590,6205 3310,6205 3275,6170 3275,4810 3160,4695 3160,1645 3125,1610 2020,1610 1990,1580 v1(1990,1535) 1690,1535
  Bottom Layer w15: v1(1990,995) v1(1990,1535)
CH_1: P4.1 P8.5 U1.8 | length 5979.4
  Top Layer w15: U1.8 575,4965 595,4945 v1(2930,4945) ; v1(3805,4935) 3805,5185 3885,5265 3885,5635 3915,5665 4040,5665 4115,5740 P8.5
  Bottom Layer w15: v1(2930,4945) 3795,4945 v1(3805,4935) ; P4.1 4255,5715 4280,5740 P8.5
CH_2: P4.2 P8.6 U3.8 | length 7034.4
  Top Layer w15: U3.8 575,3390 595,3370 2965,3370 v1(2975,3380) ; v1(3515,3380) 3515,3680 3615,3780 3615,4310 3815,4510 3815,4835 3875,4895 3875,5145 3955,5225 3955,5555 4010,5610 4090,5610 4125,5645 4645,5645 P8.6
  Bottom Layer w15: v1(2975,3380) v1(3515,3380) ; P4.2 4355,5615 4380,5640 P8.6
CH_3: P4.3 P8.7 U5.8 | length 8297.5
  Top Layer w15: U5.8 575,1770 600,1745 v1(3020,1745) ; v1(3455,1745) 3465,1755 3465,2755 3590,2880 3590,3630 3685,3725 3685,4280 3875,4470 3875,4780 3950,4855 3950,5125 4020,5195 4020,5490 4070,5540 P8.7
  Bottom Layer w15: v1(3020,1745) v1(3455,1745) ; P4.3 4455,5510 4485,5540 P8.7
CH_4: P4.4 P8.8 U7.8 | length 9545.9
  Top Layer w15: U7.8 575,140 605,110 3145,110 3180,145 3180,555 3215,590 3420,590 3420,595 3440,615 3440,1590 3580,1730 3580,2705 3680,2805 3680,3585 3755,3660 3755,4240 3945,4430 3945,4720 4015,4790 4015,5085 4085,5155 4085,5395 4130,5440 P8.8
  Bottom Layer w15: P4.4 4555,5415 4580,5440 P8.8
COINC: P10.9 U9.3 U9.4 U10.3 | length 5110
  Bottom Layer w15: P10.9 4130,6225 4155,6200 4340,6200 4365,6175 4365,5855 4340,5830 4255,5830 4140,5715 4140,5065 4170,5035 4320,5035 4345,5010 4345,4375 4365,4355 U9.4 U9.3 4585,4255 4625,4215 4625,3015 4460,2850 4460,2295 4435,2270 U10.3
COMP_1: 1.6 P10.5 U1.3 U1.4 | length 4461.1
  Top Layer w15: U1.4 U1.3 980,5480 980,5515 1005,5540 1295,5540 1345,5590 1.6 ; v1(1615,5410) 1705,5410 1750,5365 v1(2380,5365) ; v1(3360,5540) 3360,6095 3400,6135 3685,6135 3730,6180 P10.5
  Bottom Layer w15: U1.3 975,5420 985,5410 v1(1615,5410) ; v1(2380,5365) 2685,5365 2720,5400 2720,5500 2760,5540 v1(3360,5540)
COMP_2: 2.6 P10.6 U3.3 U3.4 | length 6024.6
  Top Layer w15: U3.4 U3.3 975,3930 1005,3960 1295,3960 1345,4010 2.6@1458.9,4010 ; v1(1575,3830) 1770,3830 1820,3780 v1(2380,3780) ; v1(3235,3965) 3235,4635 3355,4755 3355,5435 3455,5535 3455,6015 3495,6055 3770,6055 3830,6115 P10.6
  Bottom Layer w15: U3.3 975,3840 995,3820 1565,3820 v1(1575,3830) ; v1(2380,3780) 2695,3780 2730,3815 2730,3935 2760,3965 v1(3235,3965)
COMP_3: 3.6 P10.7 U5.3 U5.4 | length 7691.2
  Top Layer w15: U5.4 U5.3 975,2310 1000,2335 1315,2335 1360,2380 3.6 ; v1(1595,2195) 1770,2195 1805,2160 v1(2385,2160) ; v1(3230,2320) 3230,3845 3315,3930 3315,4590 3435,4710 3435,5395 3535,5495 3535,5950 3575,5990 3875,5990 3930,6045 P10.7
  Bottom Layer w15: U5.3 975,2215 995,2195 v1(1595,2195) ; v1(2385,2160) 2395,2170 2700,2170 2725,2195 2725,2295 2750,2320 v1(3230,2320)
COMP_4: 4.6 P10.8 U7.3 U7.4 | length 9408.1
  Top Layer w15: U7.4 U7.3 975,690 995,710 1320,710 1365,755 4.6 ; v1(1590,565) 1595,560 1755,560 1790,525 v1(2385,525) ; v1(3300,700) 3300,3830 3385,3915 3385,4555 3515,4685 3515,5370 3595,5450 3595,5880 3635,5920 3900,5920 4030,6050 P10.8
  Bottom Layer w15: U7.3 975,580 995,560 1585,560 v1(1590,565) ; v1(2385,525) 2390,530 2705,530 2725,550 2725,670 2755,700 v1(3300,700)
GND: 1.5 2.5 3.5 4.5 C2.1 C3.1 C5.1 C6.1 C8.1 C9.1 C11.1 C12.1 C14.1 C15.2 D1.2 D2.1 D5.2 D6.1 D9.2 D10.1 D13.2 D14.1 P3.2 P7.2 P9.2 P11.2 P12.2 R3.1 R4.1 R5.2 R8.2 R11.1 R12.1 R13.2 R16.2 R19.1 R20.1 R21.2 R24.2 R27.1 R28.1 R29.2 R32.2 U1.1 U1.2 U1.7 U2.4 U3.1 U3.2 U3.7 U4.4 U5.1 U5.2 U5.7 U6.4 U7.1 U7.2 U7.7 U8.4 U9.1 U9.2 U9.7 U10.4 U10.5
Net1_2: 1.2 R5.1 R6.1 | length 443.9
  Top Layer w15: 1.2 R6.1@2165,5540
Net2_2: 2.2 R13.1 R14.1 | length 443.9
  Top Layer w15: 2.2@1721.1,3960 R14.1@2165,3960
Net3_2: 3.2 R21.1 R22.1 | length 446
  Top Layer w15: 3.2 R21.1 2160,2330 R22.1
Net4_2: 4.2 R29.1 R30.1 | length 446
  Top Layer w15: 4.2 R29.1 2160,705 R30.1
NetC1_1: C1.1 U1.11 | length 1574.9
  Top Layer w15: v1(1315,5055) 2205,5055 2230,5080 C1.1
  Bottom Layer w15: U1.11 875,5090 910,5055 v1(1315,5055)
NetC1_2: C1.2 R1.2 | length 422.8
  Top Layer w15: C1.2 2655,5190 2680,5215 2680,5285 2710,5315 R1.2
NetC4_1: C4.1 U3.11 | length 1574.9
  Top Layer w15: v1(1315,3475) 2205,3475 2230,3500 C4.1
  Bottom Layer w15: U3.11 875,3510 910,3475 v1(1315,3475)
NetC4_2: C4.2 R9.2 | length 422.8
  Top Layer w15: C4.2 2655,3610 2680,3635 2680,3705 2710,3735 R9.2
NetC7_1: C7.1 U5.11 | length 1543.6
  Top Layer w15: v1(1295,1865) 2215,1865 2230,1880 C7.1
  Bottom Layer w15: U5.11 875,1895 905,1865 v1(1295,1865)
NetC7_2: C7.2 R17.2 | length 428.6
  Top Layer w15: C7.2 2645,1980 2670,2005 2670,2085 2690,2105 R17.2
NetC10_1: C10.1 U7.11 | length 1536.6
  Top Layer w15: v1(1315,245) 2210,245 2230,265 C10.1
  Bottom Layer w15: U7.11 875,265 895,245 v1(1315,245)
NetC10_2: C10.2 R25.2 | length 422.8
  Top Layer w15: C10.2 2635,355 2665,385 2665,455 2690,480 R25.2
NetC13_1: C13.1 U9.11 | length 1167.1
  Top Layer w15: v1(4005,3565) 4005,4305 4055,4355 U9.11
  Bottom Layer w15: v1(4005,3565) 4100,3470 4185,3470 C13.1
NetC13_2: C13.2 R36.2 | length 410.7
  Top Layer w15: R36.2 4365,3290 4395,3320 4470,3320 4490,3340 C13.2
NetD3_1: D3.1 R7.1 R8.1 R8.3 U2.6 | length 1800.5
  Top Layer w15: U2.6 1905,5905 1935,5935 1935,6060 1960,6085 2096.42,6085 D3.1 2105,6040 2130,6015 R7.1 2305,5755 2325,5735 R8.3 2680,5735 2705,5710 2705,5555 2685,5535 R8.1
NetD3_2: D3.2 D4.1 U2.7 | length 959.7
  Top Layer w15: U2.7 1890,5955 1900,5965 1900,6225 1935,6260 2098.58,6260 D3.2 2357.83,6253.58 D4.1
NetD7_1: D7.1 R15.1 R16.1 R16.3 U4.6 | length 1837.6
  Top Layer w15: U4.6 1905,4325 1935,4355 1935,4480 1960,4505 2096.42,4505 D7.1 2105,4460 2130,4435 R15.1 2305,4180 2330,4155 R16.3 2700,4155 2725,4130 2725,3975 2705,3955 R16.1
NetD7_2: D7.2 D8.1 U4.7 | length 959.7
  Top Layer w15: U4.7 1890,4375 1910,4395 1910,4655 1935,4680 2098.58,4680 D7.2 2357.83,4673.58 D8.1
NetD11_1: D11.1 R23.1 R24.1 R24.3 U6.6 | length 1840.5
  Top Layer w15: U6.6 1905,2695 1935,2725 1935,2850 1960,2875 2096.42,2875 D11.1 2105,2830 2130,2805 R23.1 2305,2545 2325,2525 R24.3 2700,2525 2725,2500 2725,2345 2705,2325 R24.1
NetD11_2: D11.2 D12.1 U6.7 | length 959.7
  Top Layer w15: U6.7 1890,2745 1910,2765 1910,3025 1935,3050 2098.58,3050 D11.2 2357.83,3043.58 D12.1
NetD15_1: D15.1 R31.1 R32.1 R32.3 U8.6 | length 1836.4
  Top Layer w15: U8.6 1905,1070 1935,1100 1935,1225 1960,1250 2096.42,1250 D15.1 2105,1205 2130,1180 R31.1 2305,915 2320,900 R32.3 2700,900 2720,880 2720,720 2700,700 R32.1
NetD15_2: D15.2 D16.1 U8.7 | length 959.7
  Top Layer w15: U8.7 1890,1120 1910,1140 1910,1400 1935,1425 2098.58,1425 D15.2 2357.83,1418.58 D16.1
NetD17_1: D17.1 F1.1 | length 569.4
  Top Layer w15: D17.1 D17.1@3972.48,879.33 ; F1.1@4539.33,880 F1.1
  Top Layer w50: D17.1 F1.1@4539.33,880
NetF1_2: F1.2 P12.1 | length 347.7
  Top Layer w50: P12.1 4445,175 4540,175 F1.2
NetP1_1: P1.1 R42.2 U10.10 | length 1543.7
  Top Layer w15: R42.2 3540,1585 3660,1705 3660,2410 3685,2435 P1.1 3730,2625 3775,2670 U10.10
NetP1_2: P1.2 R41.2 U10.11 | length 1389.7
  Top Layer w15: P1.2 3775,2335 3820,2380 3820,2530 3855,2565 4030,2565 U10.11
  Bottom Layer w15: R41.2 3640,2310 3670,2340 3725,2340 P1.2
NetP1_3: P1.3 R40.2 U10.14 | length 1045.7
  Top Layer w15: R40.2 3745,2220 P1.3 3805,2235 3840,2270 U10.14
NetP2_1: P2.1 U10.2 | length 260
  Top Layer w15: U10.2 P2.1
NetP2_2: P2.2 U10.6 | length 519
  Top Layer w15: U10.6 4450,2570 4485,2535 4485,2305 4520,2270 P2.2
NetP5_1: P5.1 R35.2 U10.15 | length 749.4
  Top Layer w15: U10.15 3935,2170 3900,2135 3900,1885 3960,1825 P5.1 R35.2
NetP5_2: P5.2 R34.2 U10.16 | length 679.9
  Top Layer w15: U10.16 3970,2070 3945,2045 3945,1920 3970,1895 4180,1895 4190,1885 P5.2 R34.2
NetP5_3: P5.3 R33.2 U10.1 | length 634
  Top Layer w15: R33.2 P5.3 4290,1915 4315,1940 4440,1940 4460,1960 4460,2045 4435,2070 U10.1
NetP6_1: P6.1 R39.2 U10.7 | length 1724.1
  Top Layer w15: U10.7 4440,2670 4515,2595 4515,2560 4535,2540 P6.1 4675,2540 4700,2515 4700,2085 4675,2060 4515,2060 4495,2040 4495,1925 4445,1875 R39.2
NetP6_2: P6.2 R38.2 U10.8 | length 1808.9
  Top Layer w15: U10.8 4405,2770 4535,2640 P6.2 4600,2645 4705,2645 4755,2595 4755,2055 4710,2010 4590,2010 4545,1965 R38.2
NetP6_3: P6.3 R37.2 U10.9 | length 2656.1
  Top Layer w15: U10.9 4030,2765 3960,2765 3940,2785 3940,2905 3970,2935 4465,2935 4490,2910 4490,2765 4515,2740 P6.3 4780,2740 4805,2715 4805,1985 4770,1950 4705,1950 4660,1905 4660,1450 R37.2
NetR1_1: R1.1 R1.3 U1.13 | length 2653.8
  Top Layer w15: U1.13@1075,5180 U1.13 1075,5040 1120,4995 2825,4995 2860,5030 R1.1 3010,5215 3030,5235 3030,5385 3000,5415 R1.3
NetR2_2: R2.2 R3.2 U2.2 | length 1070.4
  Top Layer w15: R3.2@1165,6135 1165,5990 1199.94,5955.06 1495.45,5955.06 U2.2
  Bottom Layer w15: R3.2@1165,6135 1565,6135 1590,6160 R2.2
NetR9_1: R9.1 R9.3 U3.13 | length 2645.6
  Top Layer w15: U3.13@1075,3600 U3.13 1075,3460 1110,3425 2835,3425 2860,3450 R9.1 3010,3635 3030,3655 3030,3805 3000,3835 R9.3
NetR10_2: R10.2 R11.2 U4.2 | length 1046.6
  Top Layer w15: R11.2@1165,4555 1165,4425 1214.94,4375.06 1495.45,4375.06 U4.2
  Bottom Layer w15: R11.2 1565,4555 1590,4580 R10.2
NetR17_1: R17.1 R17.3 U5.13 | length 2576.4
  Top Layer w15: U5.13 1075,1835 1095,1815 2835,1815 2860,1840 R17.1 2990,2005 3015,2030 3015,2175 2985,2205 R17.3
NetR18_2: R18.2 R19.2 U6.2 | length 1060.6
  Top Layer w15: R19.2@1165,2925 1165,2795.23 1215.17,2745.06 1495.45,2745.06 U6.2
  Bottom Layer w15: R19.2 1555,2925 1590,2960 R18.2
NetR25_1: R25.1 R25.3 U7.13 | length 2602.3
  Top Layer w15: U7.13 1075,215 1100,190 2835,190 2860,215 R25.1 3000,380 3025,405 3025,565 3010,580 R25.3
NetR26_2: R26.2 R27.2 U8.2 | length 1055.7
  Top Layer w15: R27.2@1165,1300 1165,1180 1224.94,1120.06 1495.45,1120.06 U8.2
  Bottom Layer w15: R27.2@1165,1300 1565,1300 1590,1325 R26.2
NetR36_1: R36.1 R36.3 U9.13 | length 1662.5
  Top Layer w15: U9.13 4080,4050 4080,3185 4115,3150 R36.3 4265,3035 4285,3015 4450,3015 4465,3030 R36.1
PEAK_1: C3.2 D4.2 P8.1 R7.2 | length 2373.3
  Top Layer w15: D4.2 2630,6250 2660,6220 2660,6140 ; R7.2 2635,6015 2660,6040 2660,6140 ; C3.2 2665,6135 2660,6140 ; v1(4150,6135) 4645,6135 P8.1
  Bottom Layer w15: C3.2 v1(4150,6135)
PEAK_2: C6.2 D8.2 P8.2 R15.2 | length 3627.8
  Top Layer w15: D8.2 2630,4670 2660,4640 2660,4560 ; R15.2 2635,4435 2660,4460 2660,4560 ; C6.2 2665,4555 2660,4560 ; v1(3595,4665) 3595,5335 3665,5405 3665,5815 3705,5855 3950,5855 4135,6040 P8.2
  Bottom Layer w15: C6.2 3500,4555 3595,4650 v1(3595,4665)
PEAK_3: C9.2 D12.2 P8.3 R23.2 | length 5054.4
  Top Layer w15: D12.2 2645,3040 2660,3025 2660,2935 ; R23.2 2635,2805 2660,2830 2660,2935 ; C9.2 2670,2925 2660,2935 ; v1(3365,2930) 3365,3785 3455,3875 3455,4360 3680,4585 3680,5295 3735,5350 3735,5730 3790,5785 3995,5785 4150,5940 P8.3
  Bottom Layer w15: C9.2 3360,2925 v1(3365,2930)
PEAK_4: C12.2 D16.2 P8.4 R31.2 | length 6564.8
  Top Layer w15: D16.2 2645,1415 2670,1390 2670,1300 ; R31.2 2645,1180 2670,1205 2670,1300 ; C12.2 2670,1300 ; v1(3360,1300) 3360,2795 3460,2895 3460,3740 3530,3810 3530,4330 3740,4540 3740,5225 3810,5295 3810,5680 3860,5730 4015,5730 4125,5840 P8.4
  Bottom Layer w15: C12.2 v1(3360,1300)
PULSE_1: D1.1 D2.2 P3.1 R4.2 U2.3 | length 1247.4
  Top Layer w15: P3.1 485.24,5909.76 D1.1 D2.2 R4.2@1214.76,5909.76 ; D2.2@980,5910 1490.51,5910 U2.3
PULSE_2: D5.1 D6.2 P7.1 R12.2 U4.3 | length 1247.4
  Top Layer w15: P7.1 485.24,4329.76 D5.1 D6.2 R12.2@1214.76,4329.76 ; D6.2@980,4330 1490.51,4330 U4.3
PULSE_3: D9.1 D10.2 P9.1 R20.2 U6.3 | length 1247.4
  Top Layer w15: P9.1 485.24,2699.76 D9.1 D10.2 R20.2@1214.76,2699.76 ; D10.2@980,2700 1490.51,2700 U6.3
PULSE_4: D13.1 D14.2 P11.1 R28.2 U8.3 | length 1247.4
  Top Layer w15: P11.1 759.76,1075 D13.1 D14.2 R28.2@1214.76,1074.76 ; D14.2@980,1075 1490.51,1075 U8.3
TRIG: P8.9 U9.8 | length 1100.2
  Top Layer w15: U9.8 4185,4750 4235,4800 4615,4800 4650,4835 P8.9
VCC: 1.8 2.8 3.8 4.8 C2.2 C5.2 C8.2 C11.2 C14.2 C15.1 D17.2 R6.2 R6.3 R14.2 R14.3 R22.2 R22.3 R30.2 R30.3 R33.1 R34.1 R35.1 R37.1 R38.1 R39.1 R40.1 R41.1 R42.1 U1.5 U1.14 U2.8 U3.5 U3.14 U4.8 U5.5 U5.14 U6.8 U7.5 U7.14 U8.8 U9.5 U9.14 U10.12 U10.13 | length 24780.3
  Top Layer w15: v1(1355,3760) 1355,3885 1380,3910 2.8@1458.9,3910 ; v1(1355,5340) 1355,5465 1380,5490 1.8 ; v1(1365,2110) 1365,2255 1390,2280 3.8 ; v1(1370,495) 1370,630 1395,655 4.8 ; U8.8 1825,1170 1840,1185 v1(1840,1250) ; U6.8 1825,2795 1840,2810 v1(1840,2875) ; U4.8 1825,4425 1840,4440 v1(1840,4505) ; U2.8 1825,6005 1840,6020 v1(1840,6085) ; R42.1@3540,1215 R41.1 3696.38,1215 3698.19,1213.19 ; C14.2 U9.14 4315,4055 4355,4095 4355,4435 4375,4455 U9.5 ; 4320,1215 4395,1140 R39.1 R38.1 R37.1
  Top Layer w50: 3696.38,1215 R40.1 4320,1215 4320,1360 R33.1 R34.1 R35.1 ; D17.2 3698.19,1213.19 ; C15.1 D17.2@3700,878.19
  Bottom Layer w15: U7.5 775,520 800,495 1175,495 ; U5.5 775,2135 800,2110 1175,2110 ; U3.5 775,3785 800,3760 1175,3760 ; U1.5 775,5365 800,5340 1175,5340 ; U7.14 1175,495 ; U5.14 1175,2110 ; U3.14@1175,3600 1175,3760 ; U1.14@1175,5180 1175,5340 ; C11.2 1435,495 ; C8.2 1435,2110 ; C5.2 1435,3760 ; C2.2 1435,5340 ; 1840,495 1435,495 ; 1840,900 2035,900 ; 1840,2110 1435,2110 ; 1840,2525 2020,2525 ; 1840,3760 1435,3760 ; 1840,4155 2035,4155 ; 1840,5340 1435,5340 ; 1845,5735 2035,5735 ; R30.2 2035,800 2035,900 ; R30.3 2035,900 ; R22.2 2025,2425 2020,2430 2020,2525 ; R22.3 2020,2525 ; R14.2 2035,4055 2035,4155 ; R14.3 2035,4155 ; R6.2 2035,5635 2035,5735 ; R6.3 2035,5735 ; 3850,2370 U10.13 U10.12 ; 1175,495 v1(1370,495) 1435,495 ; 1175,2110 v1(1365,2110) 1435,2110 ; 1175,3760 v1(1355,3760) 1435,3760 ; 1175,5340 v1(1355,5340) 1435,5340
  Bottom Layer w50: v1(1840,6085) 1840,5340 v1(1840,4505) 1840,4155 1840,3760 v1(1840,2875) 1840,2525 1840,2110 v1(1840,1250) 1840,900 1840,495 1840,190 3665,190 3700,225 C15.1 ; R35.1 3880,1390 3850,1420 3850,2370 3850,4010 3895,4055 U9.14
pads on no net: 1.1 1.4 1.7 2.1 2.4 2.7 3.1 3.4 3.7 4.1 4.4 4.7 U1.6 U1.9 U1.10 U1.12 U3.6 U3.9 U3.10 U3.12 U5.6 U5.9 U5.10 U5.12 U7.6 U7.9 U7.10 U7.12 U9.6 U9.9 U9.10 U9.12
copper on no net: | length 23899.5
  Top Layer w10: -894.33,81.65 -874.42,21.62 ; -884.51,6616.65 -864.42,6676.62 ; -884.42,21.64 -864.42,21.61 ; -874.42,6676.64 -854.42,6676.61 ; -870.02,2953.25 -874.42,21.62 ; -868.83,3745 -864.42,6676.62 ; -854.33,81.59 -874.42,21.62 ; -844.51,6616.59 -864.42,6676.62 ; 10,6770 10,6790 ; 10,6900 10,6920 ; 70,6760 10,6780 ; 70,6800 10,6780 ; 70,6890 10,6910 ; 70,6930 10,6910 ; 2199.09,6780 10,6780 ; 2760.91,6780 4950,6780 ; 3074.09,6910 10,6910 ; 3635.91,6910 6700,6910 ; 4890,6760 4950,6780 ; 4890,6800 4950,6780 ; 4945,4 4945,6655 ; 4950,6770 4950,6790 ; 6640,6890 6700,6910 ; 6640,6930 6700,6910 ; 6700,6900 6700,6920

## Polygon pours and split planes (outlines as drawn)
GND on Bottom Layer "Bottom Layer-GND" (solid, pour order 6): 0,6655 4900,6655 4900,0 0,0
GND on Top Layer "Top Layer-GND" (solid, pour order 8): 0,6655 4900,6655 4900,0 0,0 0,6655

## Keep-outs
Top Layer:
  lines w10: 75,6359 295,6359 295,6581 4625,6581 4625,6359 4850,6359 4850,5786 4850,2705 4850,290 4625,290 4625,105 4625,55 295,55 295,296 75,296 75,655 75,1055 75,6271 75,6360

## Other copper
Top Layer:
  text "6690 (mil)" at 3084.09,6874.01 h60
  text "4940 (mil)" at 2209.09,6744.01 h60
  text "6655.007 (mil)" at -834.01,2963.19 h60 r89.91

## Silkscreen, mask and mechanical layers (free items; w line width, h text height)
Top Overlay:
  text "Test Points" at 3785,6515 h40
  text "1" at 3325,6320 h40
  text "1" at 4530,6145 h40 r270
  text "-INO" at 3827.84,5647.62 h100
  text "TIFR" at 3230,5645 h160
  text "uC Interface" at 4785,5520 h40 r90
  text "4-Channel / SiPM Readout" at 3325,5430 h60
  text "1" at 4250,5015 h40
  text "1" at 4685,2520 h40
  text "1" at 3625,2410 h40
  text "1" at 4675,2150 h40
  text "1" at 4080,1910 h40
  text "Design by:" at 475,90 h60
  text "1" at 4440,55 h40
  text "Sanket Deshpande" at 1095,10 h60

## Text inside footprints (layer, text, board x,y; h text height)
C15: Top Overlay "+" at 3529.85,439.01 h59.06 r180